# Altium PCB PWM_Controller_SG3525.PcbDoc
Units mm, origin at the board's own origin, x right, y up, seen from the top; angles counter-clockwise.
Board outline 45 x 40 mm, 2 copper layers (Top Layer, Bottom Layer), stack 1.071 mm thick; 42 components, 17 nets, 98 pads, 12 vias.
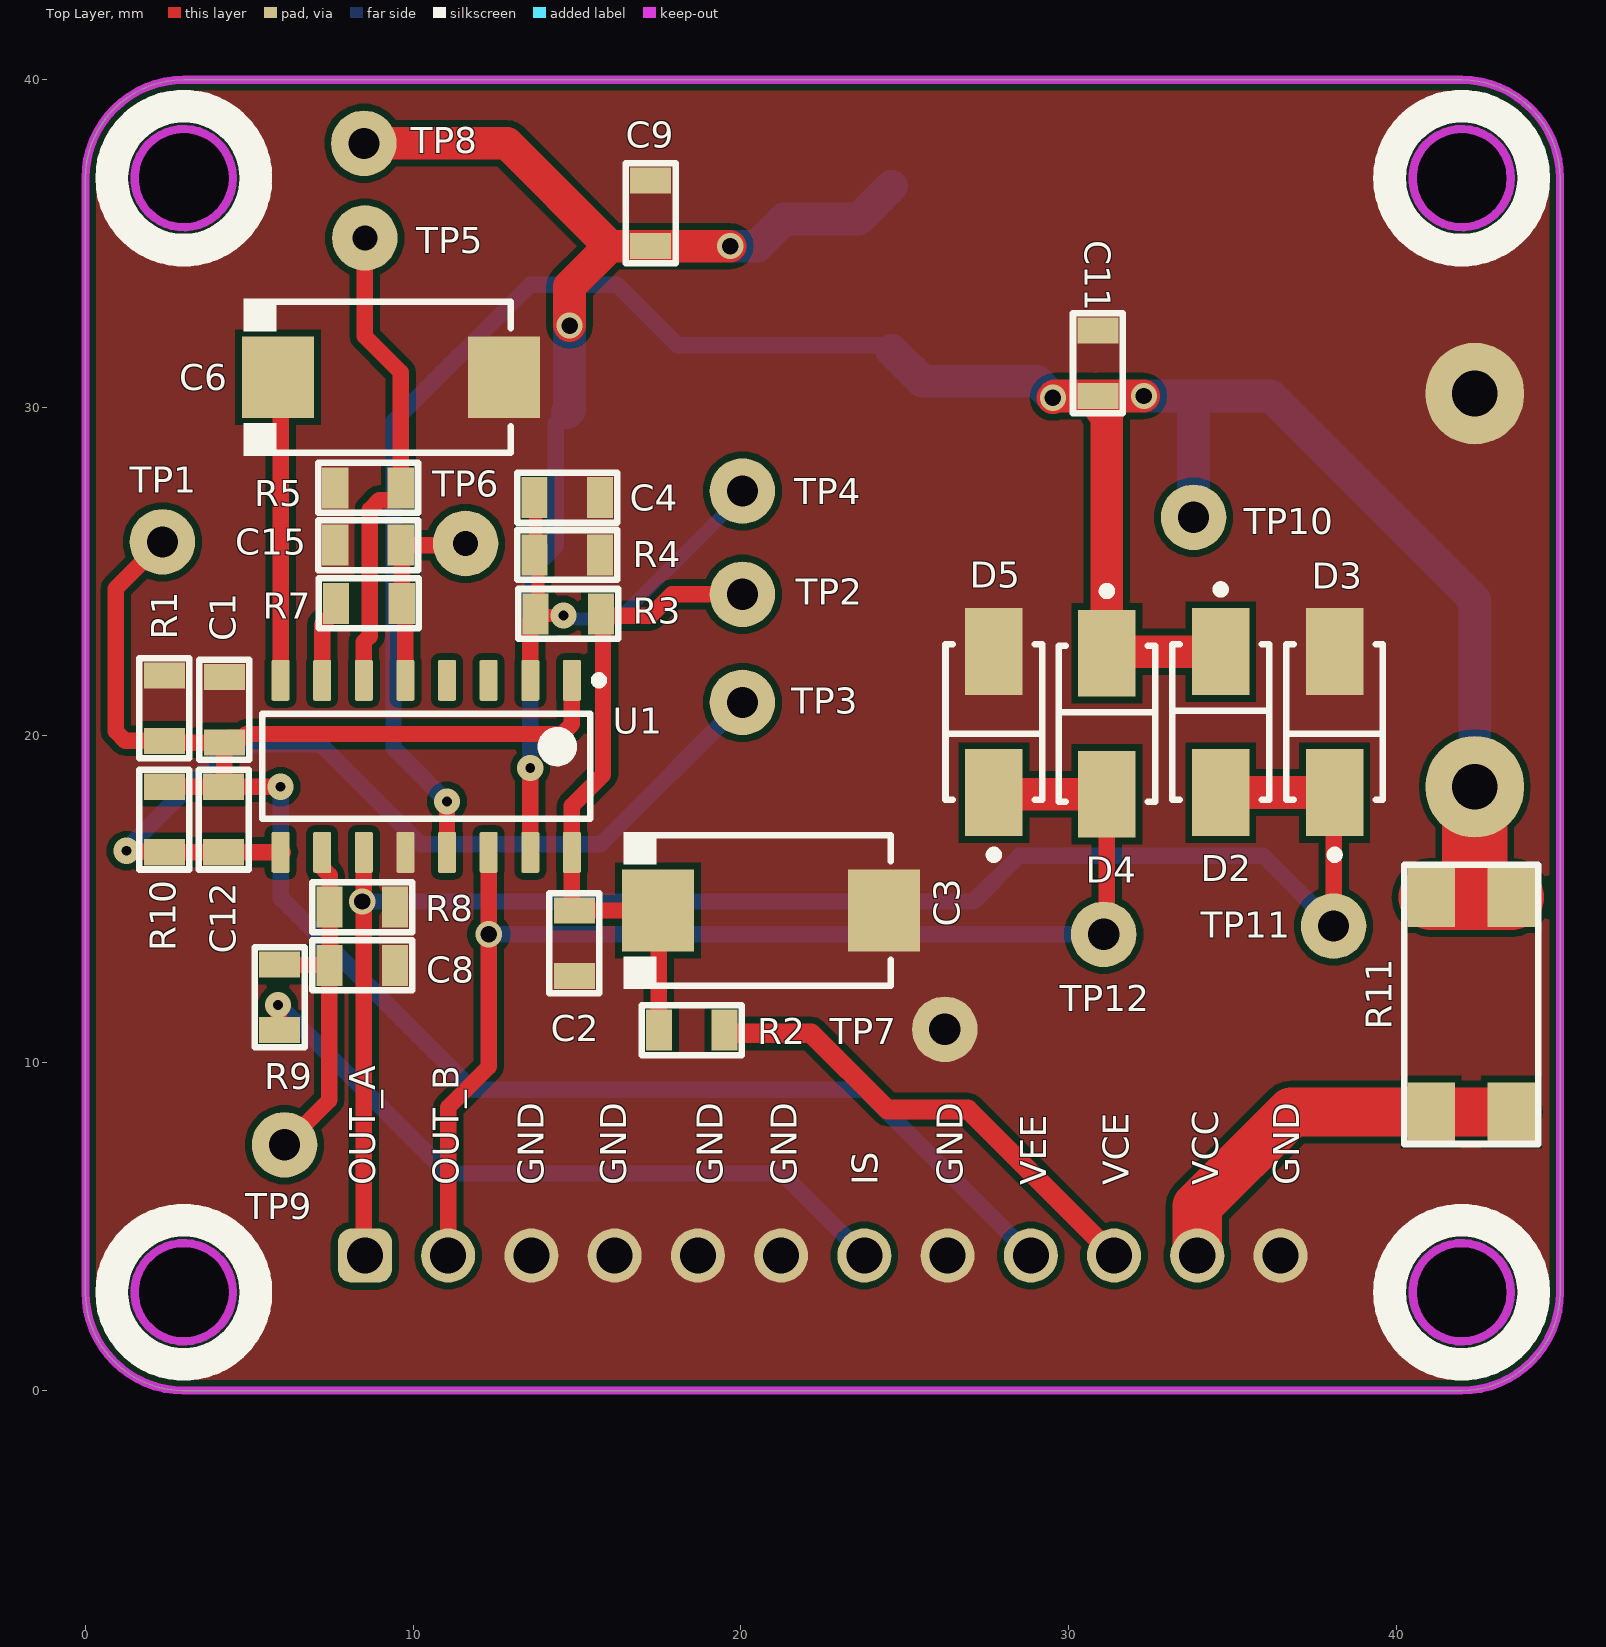
[diagram p0: Top Layer view]
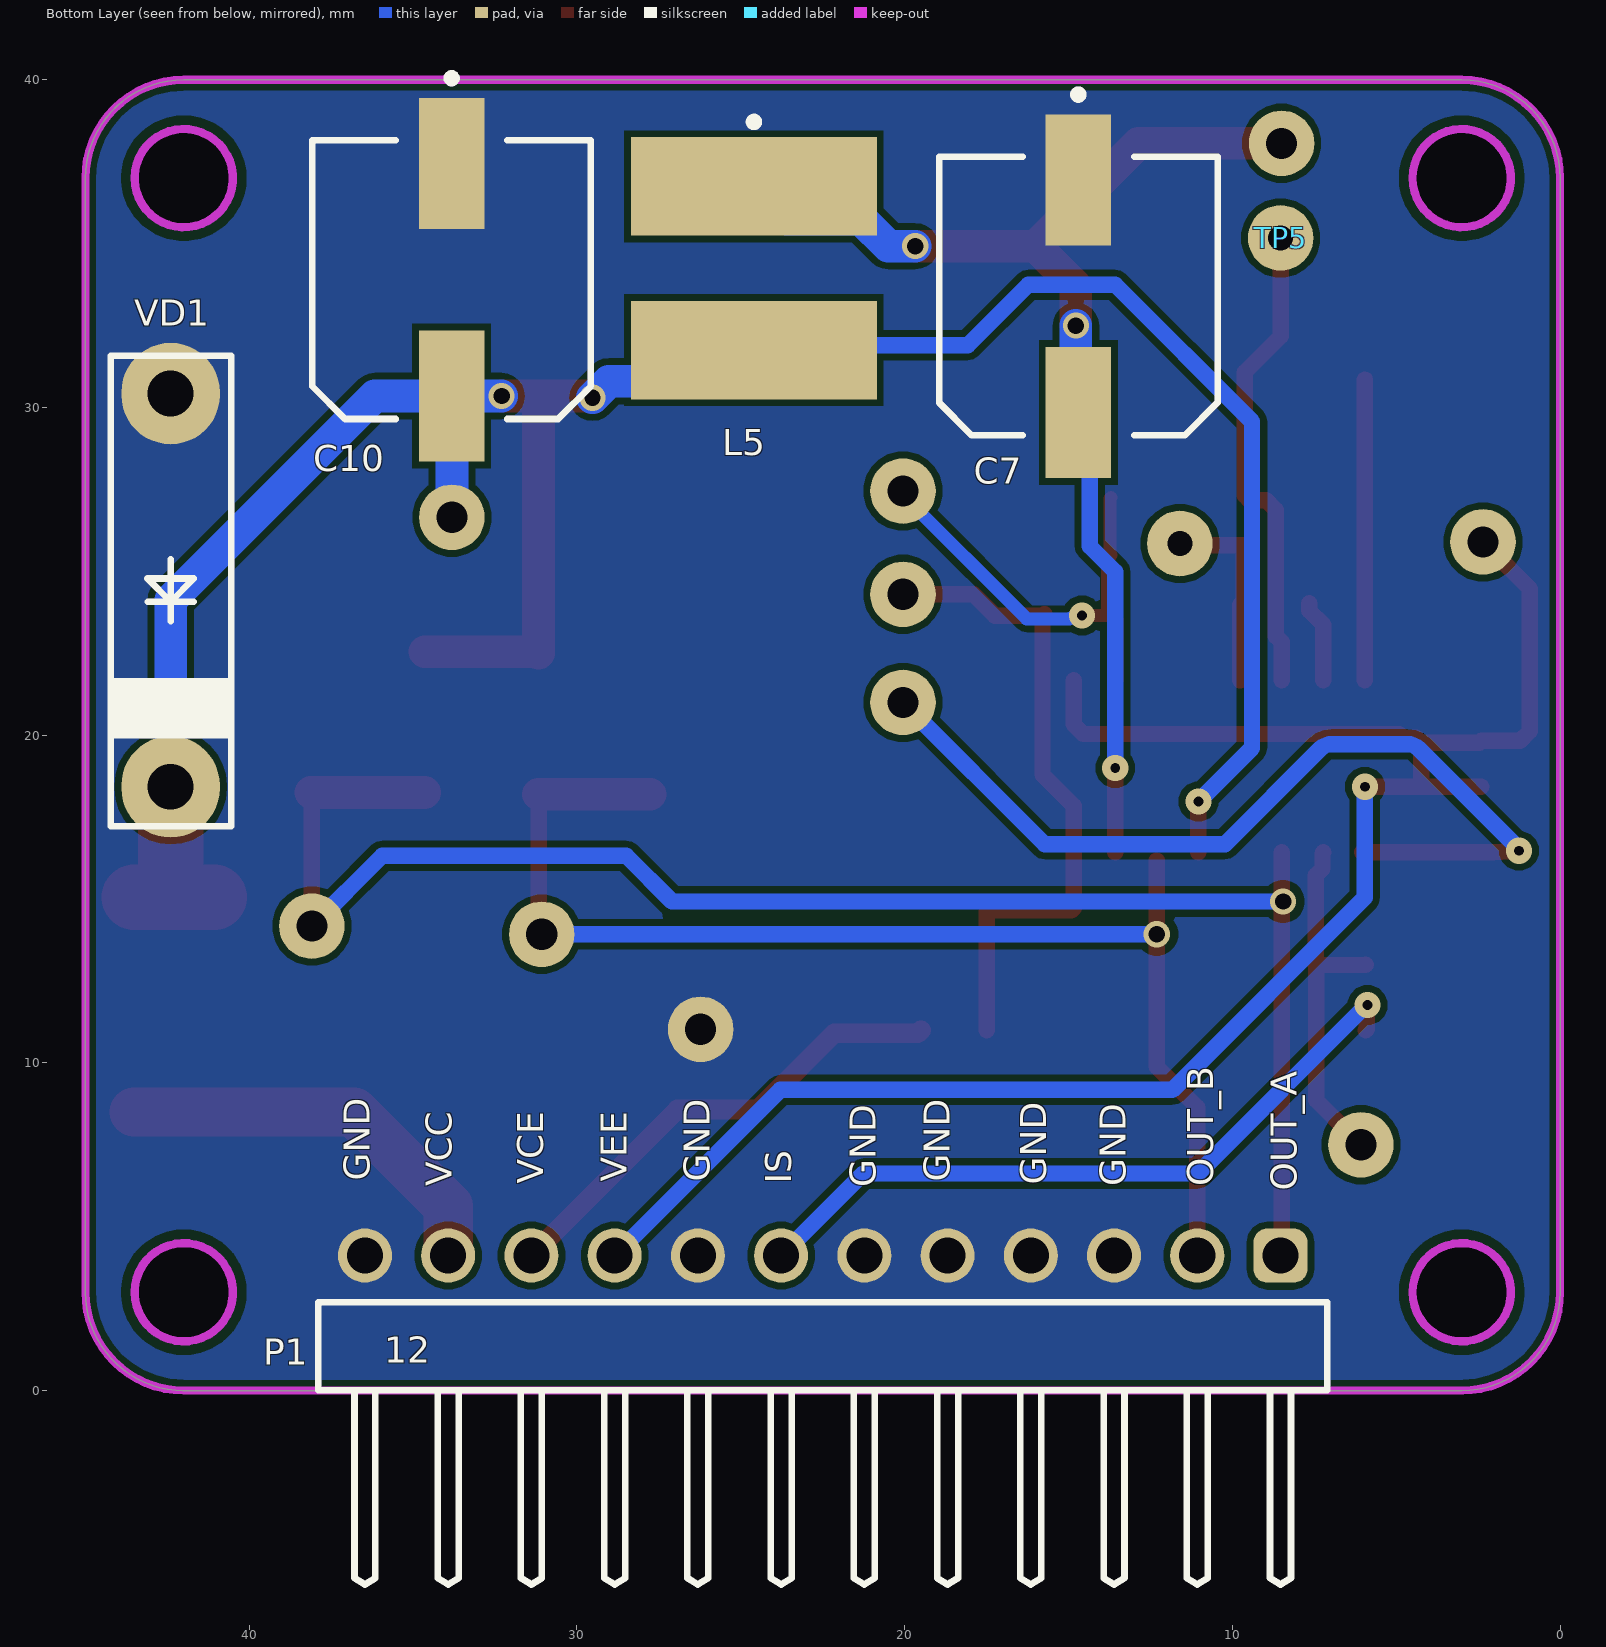
[diagram p1: Bottom Layer view, seen from below]
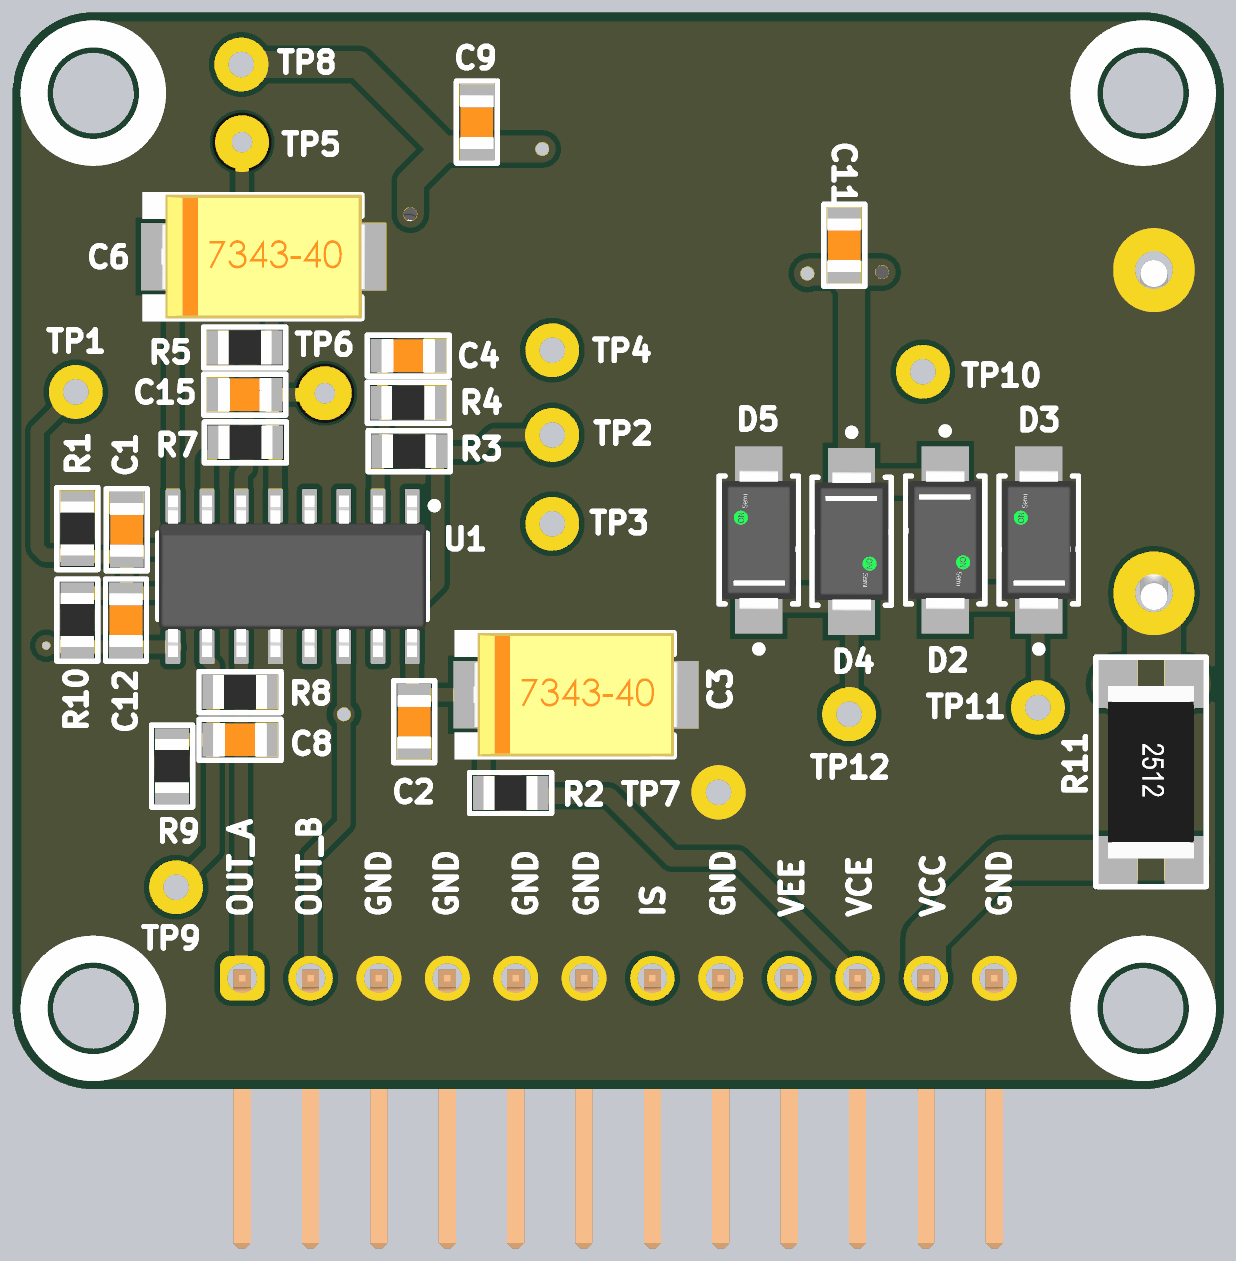
[diagram p2: 3D render of the assembled board from above, using the file's embedded part models]
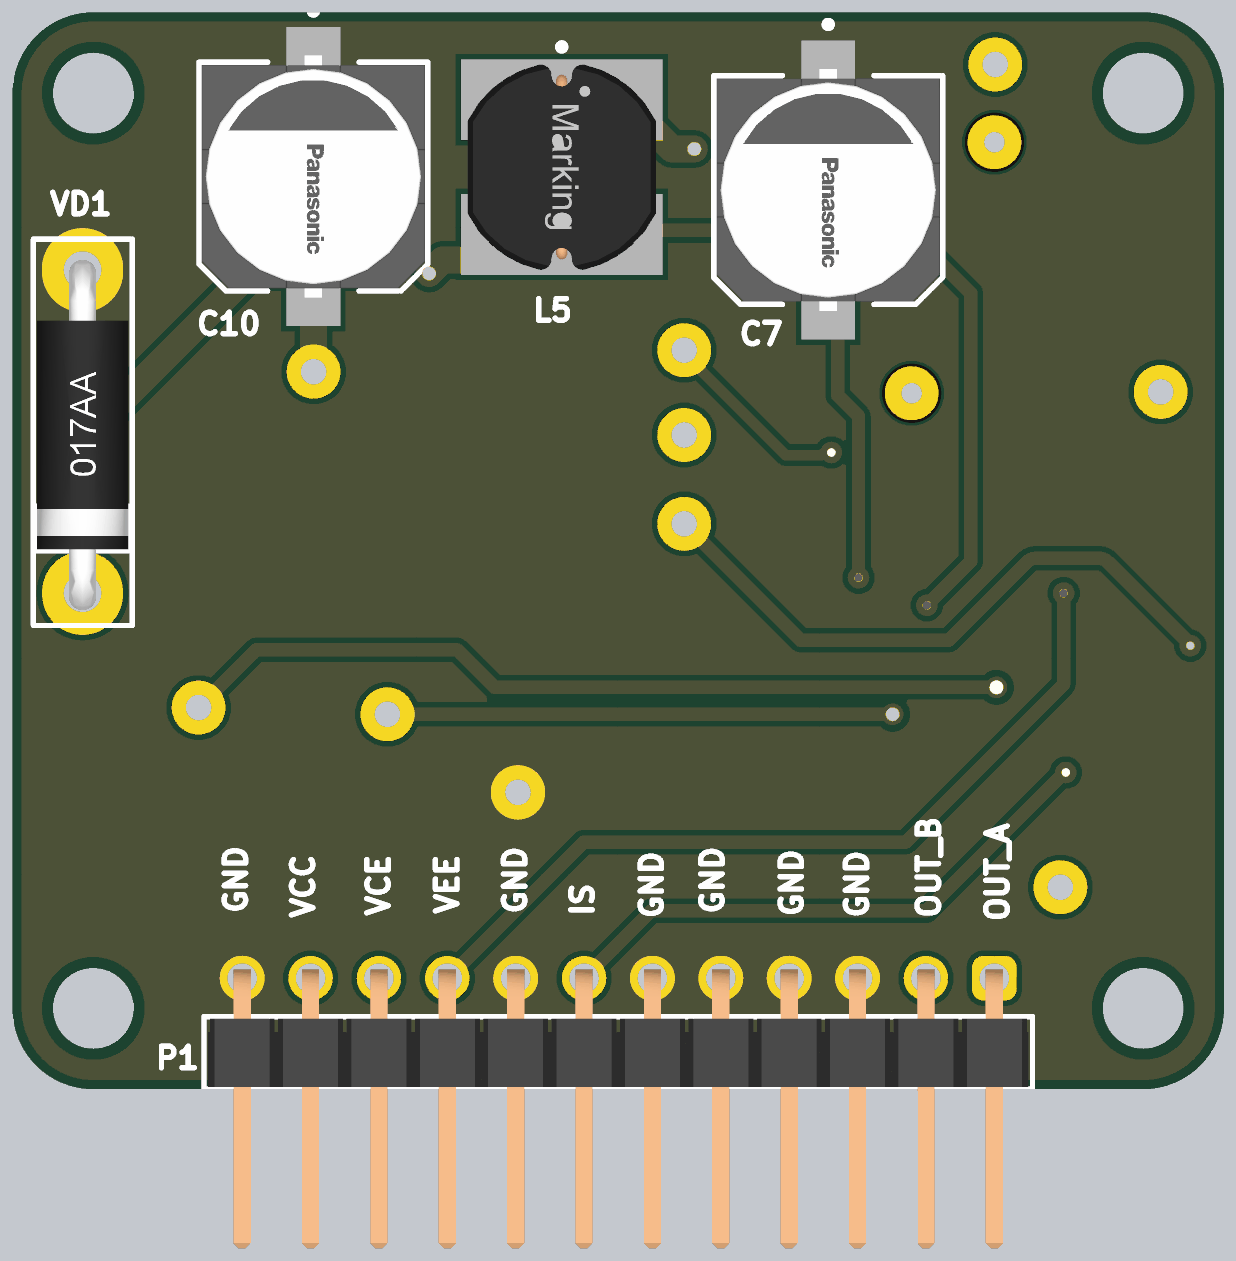
[diagram p3: 3D render of the assembled board from below, using the file's embedded part models]

## Layer stack, top to bottom
Top Solder: solder mask 0.0102, Solder Resist, Dk 3.5
Top Layer: signal copper 0.0356
Dielectric 1: dielectric 1, FR-4, Dk 4.8
Bottom Layer: signal copper 0.0356
Bottom Solder: solder mask 0.0102, Solder Resist, Dk 3.5

## Board outline
0,3 0,37 cw(c3,37) 3,40 42,40 cw(c42,37) 45,37 45,3.05 45,3 cw(c42,3) 42,0 42.029,0 2.999,0 3,0 cw(c3,3)
cut-out: 40.5,3 ccw(c42,3) 42,1.5 ccw(c42,3) 43.5,3 ccw(c42,3) 42,4.5 ccw(c42,3)
cut-out: 1.5,3 ccw(c3,3) 3,1.5 ccw(c3,3) 4.5,3 ccw(c3,3) 3,4.5 ccw(c3,3)
cut-out: 1.5,37 ccw(c3,37) 3,35.5 ccw(c3,37) 4.5,37 ccw(c3,37) 3,38.5 ccw(c3,37)
cut-out: 40.5,37 ccw(c42,37) 42,35.5 ccw(c42,37) 43.5,37 ccw(c42,37) 42,38.5 ccw(c42,37)

## Design rules (kind name [scope] priority, off if disabled: settings)
Clearance Clearance_1 [All vs InNet('GND_1')] p1: gap=0.2 ignorepadtopadclearanceinfootprint=FALSE
Clearance [All vs InNet('GND')] p2: gap=0.2 ignorepadtopadclearanceinfootprint=FALSE except(0.4: Fill-Fill Fill-Poly Fill-Region Fill-Text Fill-Hole Poly-Poly Poly-Region Poly-Text Poly-Hole Region-Region Region-Text Region-Hole)
ComponentClearance [All] p1: gap=-3 collisioncheckmode=3 verticalgap=0.254 showdistances=FALSE
DiffPairsRouting [All] p1: maxlimit=0.254 minlimit=0.254 mostfreqgap=0.254 substack1={A23D90DD-733B-49C5-8102-56B3D284E3A0} toplayer_{a23d90dd-733b-49c5-8102-56b3d284e3a0}_minwidth=0.381 toplayer_{a23d90dd-733b-49c5-8102-56b3d284e3a0}_maxwidth=0.381 toplayer_{a23d90dd-733b-49c5-8102-56b3d284e3a0}_prefwidth=0.381 bottomlayer_{a23d90dd-733b-49c5-8102-56b3d284e3a0}_minwidth=0.381 bottomlayer_{a23d90dd-733b-49c5-8102-56b3d284e3a0}_maxwidth=0.381 bottomlayer_{a23d90dd-733b-49c5-8102-56b3d284e3a0}_prefwidth=0.381 toplayer_minwidth=0.381 toplayer_maxwidth=0.381 toplayer_prefwidth=0.381 bottomlayer_minwidth=0.381 bottomlayer_maxwidth=0.381 bottomlayer_prefwidth=0.381 substack2={0B3DB408-A969-412D-8C07-BA8AE97219D9} toplayer_{0b3db408-a969-412d-8c07-ba8ae97219d9}_minwidth=0.381 toplayer_{0b3db408-a969-412d-8c07-ba8ae97219d9}_maxwidth=0.381 toplayer_{0b3db408-a969-412d-8c07-ba8ae97219d9}_prefwidth=0.381 bottomlayer_{0b3db408-a969-412d-8c07-ba8ae97219d9}_minwidth=0.381 bottomlayer_{0b3db408-a969-412d-8c07-ba8ae97219d9}_maxwidth=0.381 bottomlayer_{0b3db408-a969-412d-8c07-ba8ae97219d9}_prefwidth=0.381 substack3={378827E6-B38F-4565-9D2F-710D8D441C30} toplayer_{378827e6-b38f-4565-9d2f-710d8d441c30}_minwidth=0.381 toplayer_{378827e6-b38f-4565-9d2f-710d8d441c30}_maxwidth=0.381 toplayer_{378827e6-b38f-4565-9d2f-710d8d441c30}_prefwidth=0.381 bottomlayer_{378827e6-b38f-4565-9d2f-710d8d441c30}_minwidth=0.381 bottomlayer_{378827e6-b38f-4565-9d2f-710d8d441c30}_maxwidth=0.381 bottomlayer_{378827e6-b38f-4565-9d2f-710d8d441c30}_prefwidth=0.381 substack4={1E65D4A7-266F-4925-B814-5E9C4A66F8EE} toplayer_{1e65d4a7-266f-4925-b814-5e9c4a66f8ee}_minwidth=0.381 toplayer_{1e65d4a7-266f-4925-b814-5e9c4a66f8ee}_maxwidth=0.381 toplayer_{1e65d4a7-266f-4925-b814-5e9c4a66f8ee}_prefwidth=0.381 bottomlayer_{1e65d4a7-266f-4925-b814-5e9c4a66f8ee}_minwidth=0.381 bottomlayer_{1e65d4a7-266f-4925-b814-5e9c4a66f8ee}_maxwidth=0.381 bottomlayer_{1e65d4a7-266f-4925-b814-5e9c4a66f8ee}_prefwidth=0.381 substack5={93C5D03E-862D-45F8-9871-970EEA9B3F11} toplayer_{93c5d03e-862d-45f8-9871-970eea9b3f11}_minwidth=0.381 toplayer_{93c5d03e-862d-45f8-9871-970eea9b3f11}_maxwidth=0.381 toplayer_{93c5d03e-862d-45f8-9871-970eea9b3f11}_prefwidth=0.381 bottomlayer_{93c5d03e-862d-45f8-9871-970eea9b3f11}_minwidth=0.381 bottomlayer_{93c5d03e-862d-45f8-9871-970eea9b3f11}_maxwidth=0.381 bottomlayer_{93c5d03e-862d-45f8-9871-970eea9b3f11}_prefwidth=0.381 maxuncoupledlength=12.7
Height [All] p1: minheight=0 maxheight=50 prefheight=33
HoleSize [All] p1: absolutevalues=TRUE maxlimit=6 minlimit=0.01 maxpercent=80.000 minpercent=20.000
HoleToHoleClearance [All] p1: gap=0.1 allowstackedmicrovias=TRUE
MinimumSolderMaskSliver [All] p1: minsoldermaskwidth=0.1
PlaneClearance [All] p1: clearance=0.7
PlaneConnect [All] p1: planeconnectstyle=Direct reliefexpansion=0.5 reliefentries=4 reliefconductorwidth=0.5 reliefairgap=0.15
PolygonConnect VQFN20 [HasFootprint('VQFN20')] p1: connectstyle=Direct reliefconductorwidth=0.254 reliefentries=4 polygonreliefangle="90 Angle" airgapwidth=0.254
PolygonConnect [All] p2: connectstyle=Direct reliefconductorwidth=0.3 reliefentries=4 polygonreliefangle="90 Angle" airgapwidth=0.15
RoutingVias [All] p1: holewidth=0.1 width=0.1 viastyle="Through Hole" minholewidth=0 minwidth=0.3 maxholewidth=2 maxwidth=4
ShortCircuit [All] p1: allowed=TRUE
SilkToSolderMaskClearance [IsPad] p1: minsilkscreentomaskgap=0.1 clearancetoexposedcopper=TRUE
SolderMaskExpansion SolderMaskExpansion_Via [IsVia] p1: expansion=0.102 istentingtop=TRUE
SolderMaskExpansion [All] p2: expansion=0.01 istentingtop=FALSE
UnRoutedNet [All] p1: checkbadconnections=TRUE
Width [All] p1: maxlimit=5 minlimit=0.2 preferedwidth=0.3 substack1={A23D90DD-733B-49C5-8102-56B3D284E3A0} substack2={0B3DB408-A969-412D-8C07-BA8AE97219D9} substack3={378827E6-B38F-4565-9D2F-710D8D441C30} substack4={1E65D4A7-266F-4925-B814-5E9C4A66F8EE} substack5={93C5D03E-862D-45F8-9871-970EEA9B3F11}
19 further rules are at their usual default settings.

## Components (designator, comment, footprint, x,y, rotation, side; value= is the part's Value field where it differs from the comment)
C1 "1nF 16V" CAP-0805 4.24,20.775 r270 top
C2 "1nF 16V" CAP-0805 14.92,13.65 r90 top
C3 "100uF_16V" CAP-TAN-D 20.925,14.65 r0 top
C4 "1nF 16V" CAP-0805 14.7,27.25 r180 top
C6 "10uF_16V" CAP-TAN-D 9.325,30.925 r0 top
C7 "300uF_25V" CAP_SMD_Size_G 14.7,33.4 r270 bottom locked
C8 "2.2nF 16V" CAP-0805 8.45,12.975 r180 top
C9 "0.1uF" CAP-0805 17.25,35.925 r270 top
C10 "300uF_25V" CAP_SMD_Size_G 33.826,33.9 r270 bottom locked
C11 "0.1uF" CAP-0805 30.9,31.35 r270 top
C12 "1nF 16V" CAP-0805 4.215,17.425 r270 top
C15 "2.2nF 16V" CAP-0805 8.625,25.8 r0 top
D2 "ES1G" FP-403AE-MFG 34.646,20.4 r270 top
D3 "ES1G" FP-403AE-MFG 38.121,20.4 r90 top
D4 "ES1G" FP-403AE-MFG 31.171,20.35 r270 top
D5 "ES1G" FP-403AE-MFG 27.721,20.4 r90 top
L5 "47µH, 1.17A" WE-PD2_7850 24.6,34.25 r270 bottom locked
P1 "61301211021" 61301211021 22.5,1.35 r180 bottom
R1 "10K" RES-0805 2.406,20.825 r90 top
R2 "1K" RES-0805 18.5,11 r0 top
R3 "2K" RES-0805 14.731,23.7 r180 top
R4 "1K" RES-0805 14.7,25.5 r180 top
R5 "5,6K" RES-0805 8.625,27.55 r180 top
R7 "47" RES-0805 8.65,24.025 r180 top
R8 "2K" RES-0805 8.45,14.75 r0 top
R9 "1K" RES-0805 5.925,12 r270 top
R10 "100K" RES-0805 2.406,17.425 r90 top
R11 "RES_1210" RES-2512 42.293,11.775 r270 top locked
TP1 "" Test_Point#1 2.35,25.9 r0 top
TP2 "" Test_Point#1 20.05,24.3 r0 top
TP3 "" Test_Point#1 20.05,21 r0 top
TP4 "" Test_Point#1 20.05,27.45 r0 top
TP5 "" Test_Point#2 8.525,35.175 r180 bottom
TP6 "" Test_Point#2 11.6,25.85 r0 top
TP7 "" Test_Point#3 26.225,11.025 r0 top
TP8 "" Test_Point#1 8.495,38.063 r0 top
TP9 "" Test_Point#1 6.075,7.5 r0 top
TP10 "" Test_Point#1 33.817,26.65 r90 top
TP11 "" Test_Point#1 38.09,14.175 r90 top
TP12 "" Test_Point#1 31.075,13.925 r90 top
U1 "SG3525" SOIC-16-L 10.4,19.05 r270 top
VD1 "18V" DO-017AA 42.4,24.425 r90 bottom

## Footprints (in the part's own frame and the unit in brackets; to place one, negate y for a bottom-side part, rotate by r counter-clockwise, add the part's x,y. Pads: shape width x height; smd on the part's side, far side on the other; paste and mask are expansions set on the pad)
61301211021 [mm] "Pin Header, pitch 2.54 mm, THT, Angled, single row, 12p"
  rrect50% 1.65x1.65 hole 1.1: 1(13.97,2.77)
  round 1.65 hole 1.1: 2(11.43,2.77) 3(8.89,2.77) 4(6.35,2.77) 5(3.81,2.77) 6(1.27,2.77) 7(-1.27,2.77) 8(-3.81,2.77) 9(-6.35,2.77) 10(-8.89,2.77) 11(-11.43,2.77) 12(-13.97,2.77)
  silkscreen extent -15.39,-7.27 15.39,1.35, body extent -15.24,-7.27 15.24,3.09, height 2.58
CAP-0805 [mm]
  rect 0.8x1.25 smd mask+0.015: 1(-1,0) 2(1,0)
  silkscreen extent -1.52,-0.76 1.52,0.76, body extent -1,-0.62 1,0.63, height 0.8
CAP-TAN-D [mm]
  rect 2.2x2.5 smd: 1(-3.45,0) 2(3.45,0)
  silkscreen extent -4.5,-2.4 3.65,2.4, body extent -3.8,-2.3 3.8,2.3, height 4
CAP_SMD_Size_G [mm]
  rect 4x2 smd paste+0 mask+0: 1(3.55,0) 2(-3.55,0)
  silkscreen extent -6.27,-4.25 4.25,4.25, body extent -4.5,-4.15 4.5,4.15, height 6.5
DO-017AA [mm]
  oval 3.1x3 hole 1.4: 1(-6,0) 2(6,0)
  silkscreen extent -7.2,-1.85 7.15,1.83, body extent -6.63,-1.7 6.37,1.7, height 3.4
FP-403AE-MFG [mm]
  rect 2.65x1.75 smd paste+0 mask+0: 1(-2.15,0) 2(2.15,0)
  silkscreen extent -4.17,-1.48 2.37,1.48, body extent -2.6,-1.36 2.6,1.36, height 2.5
RES-0805 [mm]
  rect 0.8x1.25 smd mask+0.015: 1(-1,0) 2(1,0)
  silkscreen extent -1.52,-0.76 1.52,0.76, body extent -1,-0.62 1,0.63, height 0.6
RES-2512 [mm]
  rect 1.8x1.45 smd: 1(-3.275,-1.225) 1(-3.275,1.225) 2(3.275,-1.225) 2(3.275,1.225)
  silkscreen extent -4.28,-2.05 4.25,2.05, body extent -3.2,-1.6 3.2,1.6, height 0.6
SOIC-16-L [mm]
  rrect18% 1.25x0.55 smd: 1(-2.625,4.445) 2(-2.625,3.175) 3(-2.625,1.905) 4(-2.625,0.635) 5(-2.625,-0.635) 6(-2.625,-1.905) 7(-2.625,-3.175) 8(-2.625,-4.445) 9(2.625,-4.445) 10(2.625,-3.175) 11(2.625,-1.905) 12(2.625,-0.635) 13(2.625,0.635) 14(2.625,1.905) 15(2.625,3.175) 16(2.625,4.445)
  silkscreen extent -2.75,-5 1.6,5.4, body extent -3,-4.95 3,4.95, height 1.59
Test_Point#1 [mm]
  round 2 / inner round 2.5 / far side round 2 hole 0.95: 1(0,0)
Test_Point#2 [mm]
  round 2 / inner round 2.286 / far side round 2 hole 0.762 paste-2539.97 mask+0.102: 1(0,0)
Test_Point#3 [mm]
  round 2 hole 0.95: 1(0,0)
WE-PD2_7850 [mm] "SMD Power Inductor, 2-Leads, body 7.8x7mm"
  rect 3x7.5 smd: 1(-2.5,0) 2(2.5,0)
  silkscreen extent -4.59,-0.13 -4.34,0.12, body extent -3.81,-3.5 3.81,3.5, height 4.95

## Part data
C1 C2 C4 C8 C9 C11 C12 C15: library part CAP-NON-POLAR
C3 C6: library part CAP-POLAR
C7 C10: library part CAP_POL_SMD
D2 D3 D4 D5: "Ultrafast"
L5: library part 744775147, "WE-PD2 SMT Power Inductor, size 7850, 47µH, 1.17A, 0.18Ω", Case/Size Code=7850, DC Resistance=0.134Ω, DC Resistance Max=0.18Ω, Inductance=47µH, Manufacturer="Wurth Elektronik", Operating Temperature Max=125°C, Operating Temperature Min=-40°C, Rated Current=1.17A, Saturation Current=1.24A, Self Resonant Frequency=12MHz, Category="Unshielded Power Inductors", ComponentLink1Description="Website Link", ComponentLink1URL=https://www.we-online.com/redexpert/article/744775147?ad, ComponentLink2Description="Datasheet Link", ComponentLink2URL=https://www.we-online.com/redexpert/spec/744775147?ad, Height=4.95mm, Length=7.8mm, Manufacturer Part Number=744775147, Match Code=WE-PD2, Mount="Surface Mount", Packaging="Tape and Reel", Width=7mm, Simulation ModelName=7850_744775147_47u, Simulation ModelText="******* / .subckt 7850_744775147_47u 1 2 / Rp 1 2 40000 / Cp 1 2 4p / Rs 1 N3 0.1343 / L1 N3 2 47u / .ends 7850_744775147_47u", Simulation PortMap=(1:1),(2:2)
P1: "WR-PHD Pin Header, THT, Angled, pitch 2.54mm, 1 Row, 12P", Contact Resistance=20mΩ, Manufacturer="Wurth Elektronik", Operating Temperature Max=105°C, Operating Temperature Min=-40°C, Rated Current=3A, Withstanding Voltage=500V, Working Voltage=250V, Category="Board-to-Board Connectors", ComponentLink1Description="Website Link", ComponentLink1URL=https://www.we-online.com/redexpert/article/61301211021?ad, ComponentLink2Description="Datasheet Link", ComponentLink2URL=https://www.we-online.com/redexpert/spec/61301211021?ad, Gender="Pin Header", Manufacturer Part Number=61301211021, Match Code=WR-PHD, Mount="Through Hole", Number of Pins=12, Number of Rows=1, Orientation=Angled, Packaging=Bag, Pitch=2.54mm
R1 R2 R3 R4 R5 R7 R8 R9 R10: library part RES-CONST
TP1 TP2 TP3 TP4 TP5 TP6 TP7 TP8 TP9 TP10 TP11 TP12: library part TP_PCB?, "Test_Point"
VD1: library part ZENER

## Via types
v1: diameter 0.8, hole 0.3, Top Layer to Bottom Layer, tented both sides, 6 vias
v2: diameter 0.8, hole 0.5, Top Layer to Bottom Layer, tented both sides, 6 vias

## Nets (pads, with @x,y where several pads share a name; then routed paths per layer and width w, separated by ;. In a path a pad name is that pad's centre, name@x,y a point inside that pad or via, vN(x,y) a via of type N, cw(c..) or ccw(c..) an arc to the next point about the centre after c; other vN are vias at no path point)
GND: C1.1 C2.1 C3.2 C4.1 C6.2 C7.2 C8.1 C9.1 C10.2 C11.1 C15.1 D3.2 D5.2 P1.3 P1.4 P1.5 P1.6 P1.8 P1.12 R1.2 R4.1 R5.2 R8.2 TP7.1 U1.12 VD1.2
NetC1_2: C1.2 C12.1 P1.9 R1.1 R10.2 TP1.1 U1.1 | length 57.7
  Top Layer w0.5: TP1.1 0.925,24.475 0.925,20.118 1.218,19.825 R1.1 2.456,19.775 C1.2 ; R10.2 C12.1 4.24,18.451 C1.2 ; C12.1@4.24,18.425 v1(5.955,18.425) ; U1.1 14.845,20.33 14.552,20.038 4.908,20.038 4.796,19.925 4.39,19.925 C1.2
  Bottom Layer w0.5: v1(5.955,18.425) 5.955,15.048 11.828,9.175 23.795,9.175 P1.9
NetC2_2: C2.2 C3.1 R2.1 R3.1 TP2.1 U1.16 | length 20.1
  Top Layer w0.5: R3.1 15.78,23.65 17.25,23.65 17.9,24.3 TP2.1 ; R3.1@15.795,23.53 15.795,18.795 14.845,17.845 U1.16 14.845,14.725 C2.2 C3.1 17.5,14.625 R2.1
NetC4_2: C4.2 R3.2 R4.2 TP4.1 U1.2 | length 13.8
  Top Layer w0.4: R3.2@13.575,23.544 13.807,23.776 13.807,25.393 R4.2 ; C4.2 13.731,27.219 R4.2@13.731,25.5 ; R3.2 13.78,23.65 14.534,23.65 v1@14.559,23.625
  Top Layer w0.5: U1.2 R3.2@13.575,23.544
  Bottom Layer w0.4: v1(14.584,23.65) 14.661,23.573 14.944,23.573 14.967,23.55 16.275,23.55 20.05,27.325 TP4.1
NetC6_1: C6.1 U1.8 | length 9.3
  Top Layer w0.3: C6.1 C6.1@5.955,30.845
  Top Layer w0.5: U1.8 C6.1@5.955,30.845
NetC7_1: C7.1 C9.2 L5.1 TP8.1 U1.15 | length 37.7
  Top Layer w0.5: U1.15 v1(13.575,19)
  Top Layer w1: TP8.1 12.862,38.063 16,34.925 ; v2(14.775,32.5) 14.775,33.7 16,34.925 ; v2(19.675,34.925) 16,34.925
  Bottom Layer w0.5: v1(13.575,19) 13.575,24.992 14.35,25.767 14.35,29.5 C7.1
  Bottom Layer w1: C7.1 14.775,29.925 v2(14.775,32.5) ; v2(19.675,34.925) 20.495,34.925 21.32,35.75 23.6,35.75 L5.1
NetC8_2: C8.2 R8.1 R9.1 TP9.1 U1.10 | length 11.1
  Top Layer w0.5: R9.1 5.938,12.987 7.437,12.987 7.437,8.862 TP9.1 ; U1.10 7.25,16.4 7.25,15.925 7.45,15.725 R8.1 C8.2@7.45,12.987
NetC10_1: C10.1 C11.2 D2.1 D4.1 L5.2 R11.1 TP10.1 U1.13 VD1.1 | length 79.1
  Top Layer w0.5: U1.13 v1(11.035,17.975)
  Top Layer w1: v2(29.525,30.3) 29.575,30.35 C11.2@30.775,30.35 ; C11.2 C11.2@30.925,30.35 ; v2(32.3,30.35) C11.2@30.925,30.35 ; D2.1 31.221,22.55 D4.1 31.171,29.764 31.025,29.91 31.025,30.25 C11.2@30.925,30.35
  Top Layer w2: R11.1@41.068,15.05 42.4,15.05 ; VD1.1 42.4,15.05 ; R11.1@43.518,15.05 42.4,15.05
  Bottom Layer w0.5: v1(11.035,17.975) 9.4,19.61 9.4,29.575 13.575,33.75 16.225,33.75 18.075,31.9 24.45,31.9 L5.2
  Bottom Layer w1: L5.2 25.548,30.802 29.023,30.802 v2(29.525,30.3) ; v2(32.3,30.35) C10.1 ; TP10.1 33.817,30.341 C10.1 ; VD1.1 42.4,24.125 36.175,30.35 C10.1
NetC12_2: C12.2 R10.1 TP3.1 U1.9 | length 27.9
  Top Layer w0.5: v1(1.25,16.475) 2.031,16.429 R10.1 C12.2 U1.9 U1.9@6.03,16.425
  Bottom Layer w0.5: v1@1.25,16.525 4.304,19.579 cw(c4.657,19.225) 4.657,19.725 6.968,19.725 cw(c6.968,19.225) 7.321,19.579 10.225,16.675 15.725,16.675 TP3.1
NetC15_2: C15.2 R7.1 TP6.1 U1.5 | length 6.1
  Top Layer w0.5: R7.1 9.65,25.775 C15.2 11.55,25.8 TP6.1 ; U1.5 R7.1@9.765,23.984
NetD2_2: D2.2 D3.1 P1.1 TP11.1 U1.11 | length 51
  Top Layer w0.5: U1.11 8.495,14.97 v2(8.45,14.925) 8.495,14.88 8.495,4.155 P1.1 ; TP11.1 38.09,18.219 D3.1
  Top Layer w1: D2.2 D3.1
  Bottom Layer w0.5: v2(8.45,14.925) 27.1,14.925 28.5,16.325 35.94,16.325 TP11.1
NetD4_2: D4.2 D5.1 P1.2 TP12.1 U1.14 | length 39.1
  Top Layer w0.5: P1.2 11.07,8.645 12.307,9.882 v2(12.307,13.925) 12.305,13.927 U1.14@12.305,16.175 ; D5.1 D5.1@27.771,18.2 ; TP12.1 31.171,14.021 D4.2
  Top Layer w1: D5.1@27.771,18.2 D4.2
  Bottom Layer w0.5: v2(12.307,13.925) TP12.1
NetP1_7: P1.7 R9.2 | length 21.8
  Top Layer w0.5: v1(5.875,11.762) 5.9,11.737 5.9,11.025 R9.2
  Bottom Layer w0.5: v1@5.913,11.762 11.05,6.625 21.265,6.625 P1.7
NetP1_10: P1.10 R2.2 | length 14.7
  Top Layer w0.6: R2.2@19.5,11 19.6,10.9 22.15,10.9 24.475,8.575 26.935,8.575 P1.10
NetP1_11: P1.11 R11.2 | length 12.3
  Top Layer w1.5: P1.11 33.93,5.63 36.8,8.5 41.068,8.5 R11.2@43.518,8.5
NetR5_1: R5.1 TP5.1 U1.6 | length 14.7
  Top Layer w0.5: U1.6 8.495,22.845 8.675,23.025 8.675,26.882 8.968,27.175 9.475,27.175 9.625,27.325 R5.1 9.625,31.075 8.525,32.175 TP5.1
NetR7_2: R7.2 U1.7 | length 2.5
  Top Layer w0.5: U1.7 7.225,23.375 7.65,23.8 R7.2
pads on no net: U1.3 U1.4

## Polygon pours and split planes (outlines as drawn)
GND on Bottom Layer "NONET_L-01_P-001" (solid, pour order 0): -0.075,0 0,0.075 0,40 45,40 45,0.005
GND on Top Layer "NONET_L-01_P-001" (solid, pour order 2): 0,0.005 0,40 45,40 45,0.005

## Keep-outs
Keep-Out Layer:
  circle w0.254: c42,3 r1.5
  circle w0.254: c3,37 r1.5
  circle w0.254: c3,3 r1.5
  circle w0.254: c42,37 r1.5
  lines w0.254: 2.969,0 42,0 ccw(c42,3) 45,3 45,37 ccw(c42,37) 42,40 3,40 ccw(c3,37) 0,37 0,3 ccw(c3,3) 3,0

## Silkscreen, mask and mechanical layers (free items; w line width, h text height)
Top Overlay:
  circle w1: c42,3 r2.2
  circle w1: c42,37 r2.2
  circle w1: c3,3 r2.2
  circle w1: c3,37 r2.2
  text "OUT_A" at 8.839,6.263 h0.8 r90
  text "OUT_B" at 11.399,6.263 h0.8 r90
  text "GND" at 13.988,6.263 h0.8 r90
  text "GND" at 16.503,6.263 h0.8 r90
  text "GND" at 19.448,6.263 h0.8 r90
  text "GND" at 21.705,6.263 h0.8 r90
  text "IS" at 24.173,6.263 h0.8 r90
  text "GND" at 26.778,6.263 h0.8 r90
  text "VEE" at 29.325,6.263 h0.8 r90
  text "VCE" at 31.843,6.263 h0.8 r90
  text "VCC" at 34.573,6.263 h0.8 r90
  text "GND" at 37.043,6.263 h0.8 r90
Bottom Overlay:
  text "GND" at 36.329,6.404 h0.8 r270
  text "GND" at 18.624,6.379 h0.8 r270
  text "GND" at 25.954,6.379 h0.8 r270
  text "VEE" at 28.479,6.379 h0.8 r270
  text "IS" at 23.454,6.304 h0.8 r270
  text "VCE" at 31.029,6.304 h0.8 r270
  text "GND" at 15.679,6.279 h0.8 r270
  text "OUT_B" at 10.587,6.229 h0.8 r270
  text "GND" at 13.254,6.229 h0.8 r270
  text "VCC" at 33.829,6.229 h0.8 r270
  text "GND" at 20.879,6.204 h0.8 r270
  text "OUT_A" at 8.037,6.104 h0.8 r270

## Text inside footprints (layer, text, board x,y; h text height)
P1: Bottom Overlay "12" at 35.887,0.85 h0.8